# EAGLE board schematic_chess_board_Halleffect (EAGLE 9.7.0)

Size 250 x 170 mm. Coordinates in mm from the lower left corner, seen from the top.
Outline: 0,170 0,0 250,0 250,170 0,170
Copper layers (1*16): Top 0.035mm / dielectric 1.5mm / Bottom 0.035mm
Design rules "default *": minimum track width 0.4mm, minimum drill 0.2mm, track to track 0.4mm, track to pad 0.4mm, pad to pad 0.4mm, via to via 0.6mm, smd to smd 0.4mm, copper to edge 40mil, drill to drill 0.6mm, minimum pad ring 10mil, minimum via ring 8mil, stop-mask expansion 4mil, vias tented up to drill 0mil, thermal gap 10mil
Holes 20 mm at 230,20 230,150

## Footprints (pad centres in the part's own frame; a part is rotated, then mirrored left to right if it is on the bottom)
SIP3-UA = drill 0.6 pad 0.7 long: 1 -1.27,0; 2 0,0; 3 1.27,0
JST-2-PTH-KIT = drill 0.7 pad 1.448: 1 -1,0; 2 1,0
XDCR_BOB-09056 = drill 1.02 square: 1 -7.62,8.89 | drill 1.02: 2 -7.62,6.35; 3 -7.62,3.81; 4 -7.62,1.27; 5 -7.62,-1.27; 6 -7.62,-3.81; 7 -7.62,-6.35; 8 -7.62,-8.89; 9 7.62,19.05; 10 7.62,16.51; 11 7.62,13.97; 12 7.62,11.43; 13 7.62,8.89; 14 7.62,6.35; 15 7.62,3.81; 16 7.62,1.27; 17 7.62,-1.27; 18 7.62,-3.81; 19 7.62,-6.35; 20 7.62,-8.89; 21 7.62,-11.43; 22 7.62,-13.97; 23 7.62,-16.51; 24 7.62,-19.05

## Placement (x,y rotation side)
IC1  A1384UA  [SIP3-UA]  25,160.7 0 top
IC2  A1384UA  [SIP3-UA]  75,160.7 0 top
IC3  A1384UA  [SIP3-UA]  125,159.3 0 top
IC4  A1384UA  [SIP3-UA]  175,159.3 0 top
IC5  A1384UA  [SIP3-UA]  25,110.7 0 top
IC6  A1384UA  [SIP3-UA]  75,110.7 0 top
IC7  A1384UA  [SIP3-UA]  125,110.7 0 top
IC8  A1384UA  [SIP3-UA]  175,110.7 0 top
IC9  A1384UA  [SIP3-UA]  25,60.7 0 top
IC10  A1384UA  [SIP3-UA]  75,60.7 0 top
IC11  A1384UA  [SIP3-UA]  125,60.7 0 top
IC12  A1384UA  [SIP3-UA]  175,60.7 0 top
IC13  A1384UA  [SIP3-UA]  25,10.7 0 top
IC14  A1384UA  [SIP3-UA]  75,10.7 0 top
IC15  A1384UA  [SIP3-UA]  125,10.7 0 top
IC16  A1384UA  [SIP3-UA]  175,10.7 0 top
J1  [JST-2-PTH-KIT]  228.6,68.58 270 bottom
TB1  BOB-09056  [XDCR_BOB-09056]  234.95,106.68 0 bottom

## Library data of the parts
IC1-IC16 = allegro; MPN: A1384LUA-T; OC_FARNELL: unknown; OC_NEWARK: 30M9961
J1 = SparkFun-Connectors
TB1 = BOB-09056; AVAILABILITY: In Stock; CHECK_PRICES: https://www.snapeda.com/parts/BOB-09056/SparkFun+Electronics/view-part/?ref=eda; DESCRIPTION: 74HC4067 Analog and Digital Switch Interface Evaluation Board; MF: SparkFun Electronics; MP: BOB-09056; PACKAGE: None; PRICE: None; PURCHASE-URL: https://www.snapeda.com/api/url_track_click_mouser/?unipart_id=482777&manufacturer=SparkFun Electronics&part_name=BOB-09056&search_term=None; SNAPEDA_LINK: https://www.snapeda.com/parts/BOB-09056/SparkFun+Electronics/view-part/?ref=snap

## Nets
5V: IC1.1 IC2.1 IC3.1 IC4.1 IC5.1 IC6.1 IC7.1 IC8.1 IC9.1 IC10.1 IC11.1 IC12.1 IC13.1 IC14.1 IC15.1 IC16.1 J1.1 TB1.2
GND: IC1.2 IC2.2 IC3.2 IC4.2 IC5.2 IC6.2 IC7.2 IC8.2 IC9.2 IC10.2 IC11.2 IC12.2 IC13.2 IC14.2 IC15.2 IC16.2 J1.2 TB1.1
N$3: IC1.3 TB1.9
N$4: IC2.3 TB1.10
N$5: IC3.3 TB1.11
N$6: IC4.3 TB1.12
N$7: IC5.3 TB1.13
N$8: IC6.3 TB1.14
N$9: IC7.3 TB1.15
N$10: IC8.3 TB1.16
N$11: IC16.3 TB1.17
N$12: IC15.3 TB1.18
N$13: IC14.3 TB1.19
N$14: IC13.3 TB1.20
N$15: IC12.3 TB1.21
N$16: IC11.3 TB1.22
N$17: IC10.3 TB1.23
N$18: IC9.3 TB1.24

## Tracks (layer width: path | path; a pad name or v marks a point on that pad's centre or on a via)
5V  (17 unrouted)
GND  (17 unrouted)
N$3  (1 unrouted)
N$4  (1 unrouted)
N$5  (1 unrouted)
N$6  (1 unrouted)
N$7  (1 unrouted)
N$8  (1 unrouted)
N$9  (1 unrouted)
N$10  (1 unrouted)
N$11  (1 unrouted)
N$12  (1 unrouted)
N$13  (1 unrouted)
N$14  (1 unrouted)
N$15  (1 unrouted)
N$16  (1 unrouted)
N$17  (1 unrouted)
N$18  (1 unrouted)